# Altium PCB MAINSSMB V1.4 .PcbDoc (part 2 of 2)
Units mm, origin at the board's own origin, x right, y up, seen from the top; angles counter-clockwise.
Board outline 44.25 x 69.93 mm, 2 copper layers (Top Layer, Bottom Layer), stack 1.671 mm thick; 41 components, 30 nets, 189 pads, 20 vias.
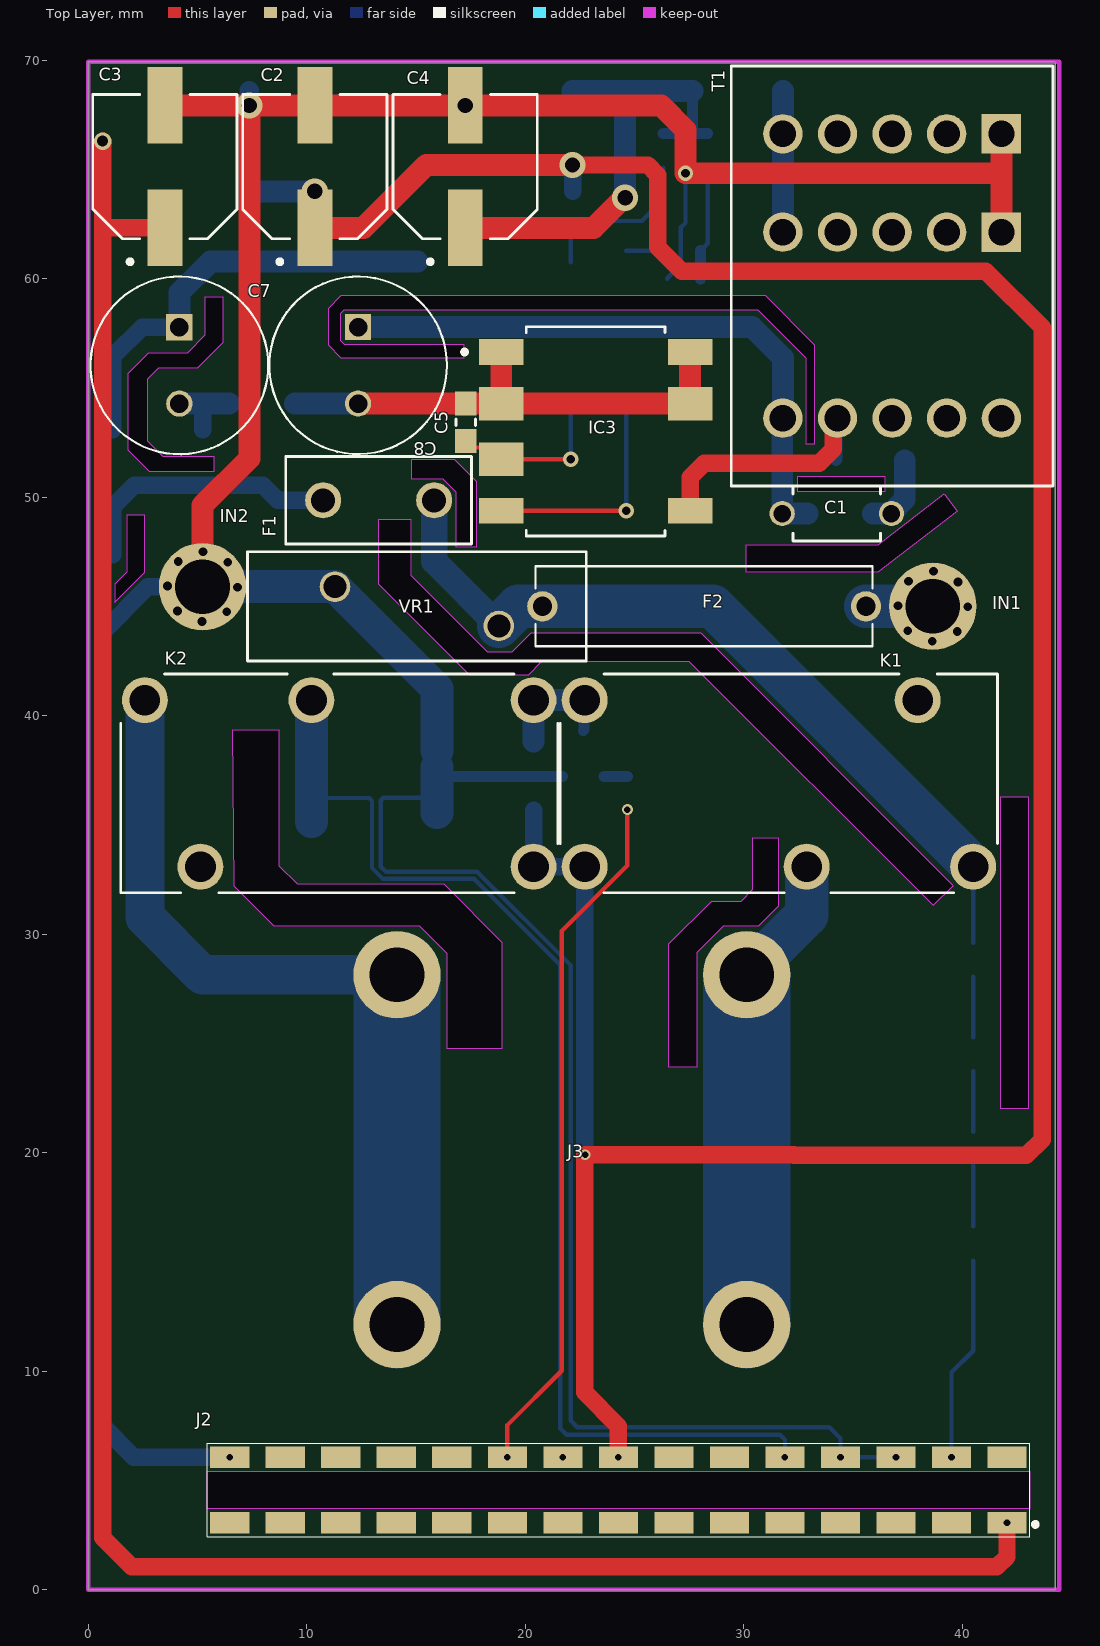
[diagram p0: Top Layer view]

## Part data (continued)
VR1: "Var MOV 275VAC/350VDC 4500A 430V Thru-Hole Radial Automotive Bulk", Manufacturer="TDK EPCOS", Manufacturer Part Number=B72214S0271K101, Supplier Part Number=495-1412-ND, Category=Varistors, ComponentLink1Description=https://datasheet.ciiva.com/11834/0900766b80188ddb-11834422.pdf?src-supplier=Rs, ComponentLink1URL=https://datasheet.ciiva.com/11834/0900766b80188ddb-11834422.pdf?src-supplier=Rs, ComponentLink2Description=https://datasheet.ciiva.com/4540/siov-leaded-standard-4540892.pdf?src-supplier=Mouser, ComponentLink2URL=https://datasheet.ciiva.com/4540/siov-leaded-standard-4540892.pdf?src-supplier=Mouser, ComponentLink3Description=https://datasheet.ciiva.com/1278/1899727-1278041.pdf?src-supplier=Element14, ComponentLink3URL=https://datasheet.ciiva.com/1278/1899727-1278041.pdf?src-supplier=Element14, Pricing="1=0.76, 10=0.46, 25=0.3804, 100=0.2902, 250=0.24588, 500=0.21856, 1000=0.19569, 2500=0.17105, 5000=0.15589 (USD)", RoHS=Yes, Stock=42424, Supplier=Digikey

## Via types
v1: diameter 0.5, hole 0.3, Top Layer to Bottom Layer, tented both sides, 10 vias
v2: diameter 1.2, hole 0.7, Top Layer to Bottom Layer, tented both sides, 5 vias
v3: diameter 0.7, hole 0.4, Top Layer to Bottom Layer, tented both sides, 3 vias
v4: diameter 0.8, hole 0.5, Top Layer to Bottom Layer, tented both sides, 1 vias
v5: diameter 0.5, hole 0.3, Top Layer to Bottom Layer, 1 vias

## Nets (pads, with @x,y where several pads share a name; then routed paths per layer and width w, separated by ;. In a path a pad name is that pad's centre, name@x,y a point inside that pad or via, vN(x,y) a via of type N, cw(c..) or ccw(c..) an arc to the next point about the centre after c; other vN are vias at no path point)
3V3-MAIN: C3.1 IC1.4 J2.01 | length 110.5
  Top Layer w0.8: v4(0.651,66.294) 0.651,62.281 ; C3.1 0.696,62.326 0.651,62.281 ; v1(42.037,3.071) 42.037,1.528 41.568,1.059 1.979,1.059 0.651,2.387 0.651,62.281
5V-MAIN: C2.1 D5.K IC1.3 IC7.3 J2.16 K1.A2 K2.A1 | length 136.4
  Top Layer w0.8: v2(22.157,65.202) 25.592,65.202 26.06,64.733 26.06,61.443 27.153,60.35 41.072,60.35 43.647,57.775 43.647,20.609 42.926,19.888 32.309,19.888 32.283,19.914 v1(22.733,19.914) 22.708,19.888 22.708,9.042 24.257,7.493 v1(24.257,6.071)
  Top Layer w1: v2(10.363,63.994) C2.1 12.592,62.326 15.469,65.202 v2(22.157,65.202)
  Bottom Layer w0.8: D5.K K2.A1 K1.A2 22.708,19.939 v1(22.733,19.914) ; IC7.3 v2(22.157,65.202)
  Bottom Layer w1: IC1.3 v2(10.363,63.994)
CUR-SHT-1: J2.10 K2.COM R17.2 R19.2 | length 55.1
  Bottom Layer w0.2: R19.2 10.211,35.529 10.921,36.239 12.859,36.239 12.983,36.116 12.983,33.037 13.484,32.536 17.655,32.536 21.587,28.603 21.587,7.394 21.88,7.101 31.646,7.101 31.877,6.871 v1(31.877,6.071)
  Bottom Layer w1.5: R19.2 10.211,36.239 R17.2 K2.COM
LEAK_INT: J2.18
  other v5: 21.717,6.071
NetC1_1: C1.1 D3.K R1.1 | length 3.5
  Bottom Layer w1: R1.1@35.912,49.251 C1.1 36.75,49.291 37.359,49.9 D3.K
NetC4_1: C4.1 D2.1 IC7.1 R2.2 R3.2 | length 22.2
  Top Layer w1: C4.1 23.13,62.326 24.508,63.703 v2(24.562,63.703)
  Bottom Layer w0.5: R2.2 R3.2 ; 27.649,66.675 D2.1
  Bottom Layer w1: IC7.1 22.164,68.587 24.562,68.587 ; v2(24.562,63.703) 24.562,68.58 D2.1
NetC5_1: C5.1 IC3.3 IC4.4 | length 8.1
  Top Layer w0.2: C5.1 17.581,52.273 18.367,52.273 IC3.3 v3(22.073,51.742)
  Bottom Layer w0.2: IC4.4 22.073,51.816 v3@22.123,51.765
NetC9_1: C9.1 IC4.2 IC5.2 | length 2.8
  Bottom Layer w0.2: IC4.2@24.613,61.282 C9.1 IC5.2
NetC9_2: C9.2 IC5.1 R3.1 R4.2 | length 5.3
  Bottom Layer w0.2: C9.2 28.343,61.622 IC5.1 R3.1
  Bottom Layer w0.5: R4.2 C9.2
NetD1_AC1: D1.AC1 F1.2 | length 12.5
  Bottom Layer w0.8: D1.AC1 1.125,49.563 2.108,50.546 7.976,50.546 8.661,49.86 F1.2
NetD2_2: D2.2 T1.5 | length 6.5
  Bottom Layer w1: T1.5@31.779,62.128 31.779,66.628 D2.2
NetD3_A: D3.A IC3.5 T1.7 | length 12.1
  Top Layer w0.8: IC3.5 27.534,50.916 28.177,51.559 33.445,51.559 34.088,52.202 34.088,53.427 T1.7
  Bottom Layer w0.5: D3.A 34.249,51.719 34.249,53.588 T1.7
NetD5_A: D5.A K1.A1 K2.A2 Q1.3 | length 5.6
  Bottom Layer w0.5: Q1.3 22.677,39.361 22.677,40.686 K1.A1
  Bottom Layer w1: D5.A K2.A2 K1.A1
NetF2_1: F2.1 IN1.1 | length 3.1
  Bottom Layer w2: F2.1 IN1.1@38.644,45.009
NetIC3_4: IC3.4 IC4.3 | length 11.2
  Top Layer w0.2: IC3.4 v3(24.613,49.38) ; v3@24.521,49.472 24.604,49.555 v3@24.74,49.555
  Bottom Layer w0.2: IC4.3 24.613,49.611 24.668,49.555 v3@24.74,49.555
NetIC4_1: IC4.1 R2.1 | length 7.8
  Bottom Layer w0.2: IC4.1 22.073,62.357 22.352,62.636 25.324,62.636 26.303,63.615 R2.1
NetJ3_1: J3.1 J3.3 K2.NO | length 38.6
  Bottom Layer w1.8: K2.NO 2.591,30.785 5.233,28.142 J3.1
  Bottom Layer w4: J3.3 J3.1
NetJ3_2: J3.2 J3.4 K1.COM | length 22.1
  Bottom Layer w2: J3.2 32.868,30.886 K1.COM
  Bottom Layer w4: J3.4 J3.2
NetQ1_1: Q1.1 R21.2 | length 1.1
  Bottom Layer w0.5: Q1.1 R21.2
NetR5_1: R5.1 R7.1 | length 2.8
  Bottom Layer w0.2: R5.1 R7.1
NetR5_2: R5.2 R6.1 | length 2.8
  Bottom Layer w0.2: R6.1 R5.2
NetR7_2: R7.2 R8.2 | length 2.8
  Bottom Layer w0.2: R7.2 R8.2
POWER-300V: C7.1 D1.POS L1.1 | length 20
  Bottom Layer w0.8: D1.POS 1.125,53.292 1.125,56.446 2.461,57.782 C7.1
  Bottom Layer w1: C7.1 4.166,59.36 5.588,60.782 L1.1
POWER-300V-R: C1.2 C8.1 L1.2 R1.2 T1.6 | length 28.3
  Bottom Layer w1: C8.1 12.346,57.784 15.061,57.784 L1.2 30.381,57.782 31.779,56.384 T1.6 ; T1.6@31.75,53.589 C1.2 R1.2@32.922,49.251
POWER-GND: C7.2 D1.NEG L2.1 | length 3.5
  Bottom Layer w0.8: D1.NEG 5.225,53.292 5.225,54.282
  Bottom Layer w1: C7.2 5.225,54.282 L2.1
POWER-GND-R: C5.2 C8.2 IC3.1 IC3.2 IC3.7 IC3.8 L2.2 | length 22.8
  Top Layer w1: C8.2 12.347,54.282 C5.2 IC3.2 ; IC3.1 IC3.2 ; IC3.8 IC3.7 IC3.2
  Bottom Layer w1: L2.2 9.453,54.285 C8.2
POWER_L: C2.2 C3.2 C4.2 D1.AC2 IC1.1 IC5.3 IC7.2 IN2.1 J2.06 J2.08 J2.30 Q1.2 R4.1 R17.1 R19.1 T1.1 VR1.1 | length 199.3
  Top Layer w1: C3.2 v2(7.368,67.926) ; IN2.1@5.225,45.909 5.225,49.624 7.368,51.767 v2(7.368,67.926) ; T1.1@41.779,62.128 41.779,64.846 ; T1.1@41.779,66.628 41.779,64.846 ; v2(7.368,67.926) C2.2 v2(17.247,67.926) 26.207,67.926 27.323,66.81 v3(27.323,64.827) 41.76,64.827 41.779,64.846
  Bottom Layer w0.2: R19.1 15.957,35.561 15.272,36.246 13.503,36.246 13.386,36.129 13.386,33.096 13.619,32.863 17.79,32.863 22.081,28.572 22.081,7.739 22.377,7.442 33.909,7.442 34.417,6.934 v1(34.417,6.071) v1(36.957,6.071) ; R17.1@15.957,37.643 R17.1 ; R4.1 26.493,60.025 27.11,60.643 27.11,62.34 27.323,62.552 v3(27.323,64.827)
  Bottom Layer w0.5: R17.1 16.338,38.024 16.338,37.39 16.517,37.211 Q1.2
  Bottom Layer w0.8: IN2.1@5.225,45.909 3.625,45.909 2.729,45.909 0.651,43.831 0.651,7.503 2.083,6.071 v1(6.477,6.071)
  Bottom Layer w0.9: v2(7.368,67.926) IC1.1
  Bottom Layer w1.5: IN2.1@6.825,45.909 VR1.1 15.957,41.239 R17.1 ; R19.1@15.957,35.561 15.957,36.271 R17.1@15.957,37.643
POWER_N: F1.1 F2.2 K1.NO R8.1 VR1.2 | length 37.5
  Bottom Layer w0.2: R8.1 K1.NO
  Bottom Layer w1.2: F1.1 15.824,47.071 VR1.2
  Bottom Layer w2: VR1.2 19.687,45.009 28.575,45.009 K1.NO
POWER_N_D: J2.04 R6.2 | length 9.4
  Bottom Layer w0.2: v1(39.497,6.071) 39.497,9.957 40.488,10.947 R6.2
RELAY: J2.20 R21.1 | length 31.9
  Top Layer w0.2: v1(19.177,6.071) 19.177,7.544 21.666,10.033 21.666,30.15 24.663,33.147 v1(24.663,35.701)
pads on no net: IC1.2 J2.02 J2.03 J2.05 J2.07 J2.09 J2.11 J2.12 J2.13 J2.14 J2.15 J2.17 J2.19 J2.21 J2.22 J2.23 J2.24 J2.25 J2.26 J2.27 J2.28 J2.29 K1.NC K2.NC T1.2 T1.3 T1.4 T1.8 T1.9 T1.10

## Keep-outs
Keep-Out Layer:
  lines w0.2: 0,0 0,69.926 44.425,69.926 44.425,0 0,0

## Silkscreen, mask and mechanical layers (free items; w line width, h text height)
Bottom Overlay:
  drawing of 30 lines, arcs and shapes, not listed